# EAGLE board Arduino-I2C-Shield-Panel-0.51mm (EAGLE 7.7.0), part 1 of 2
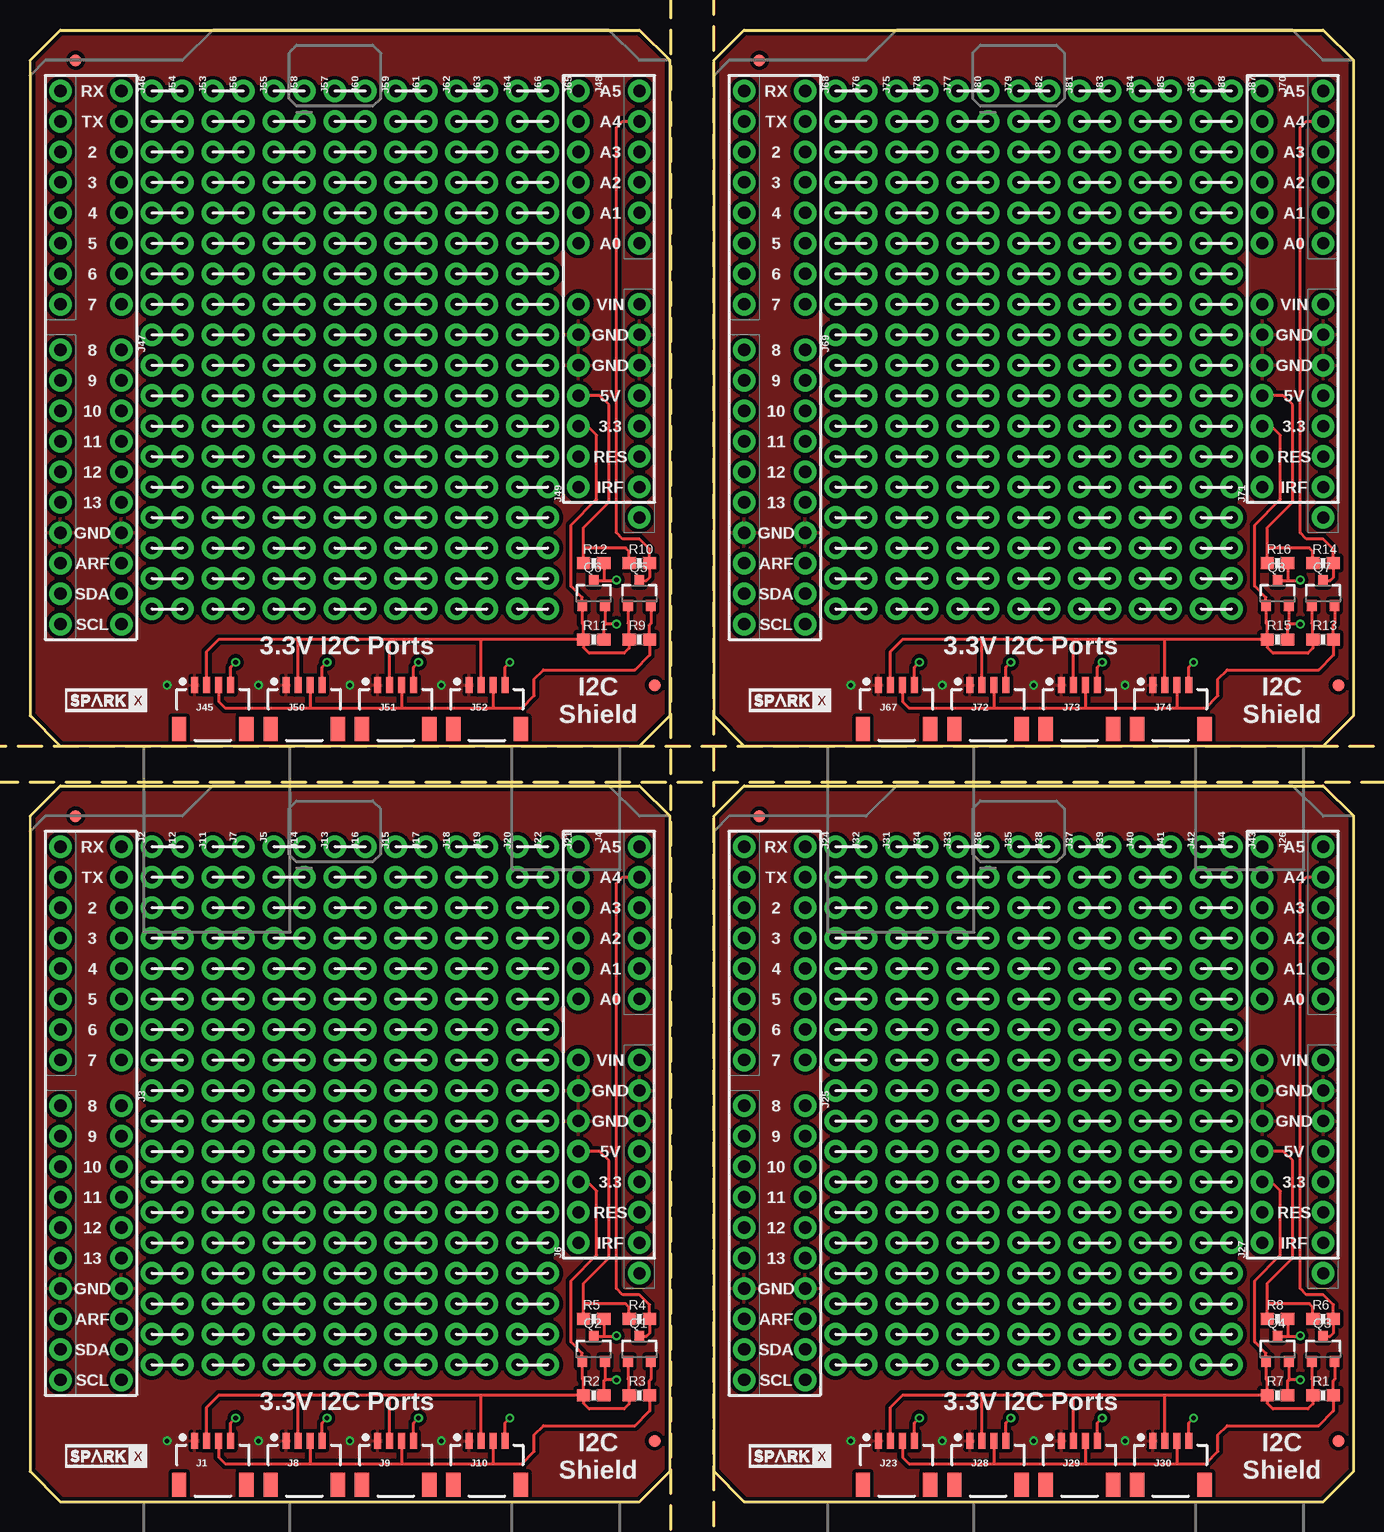
[diagram p0: board, top side]
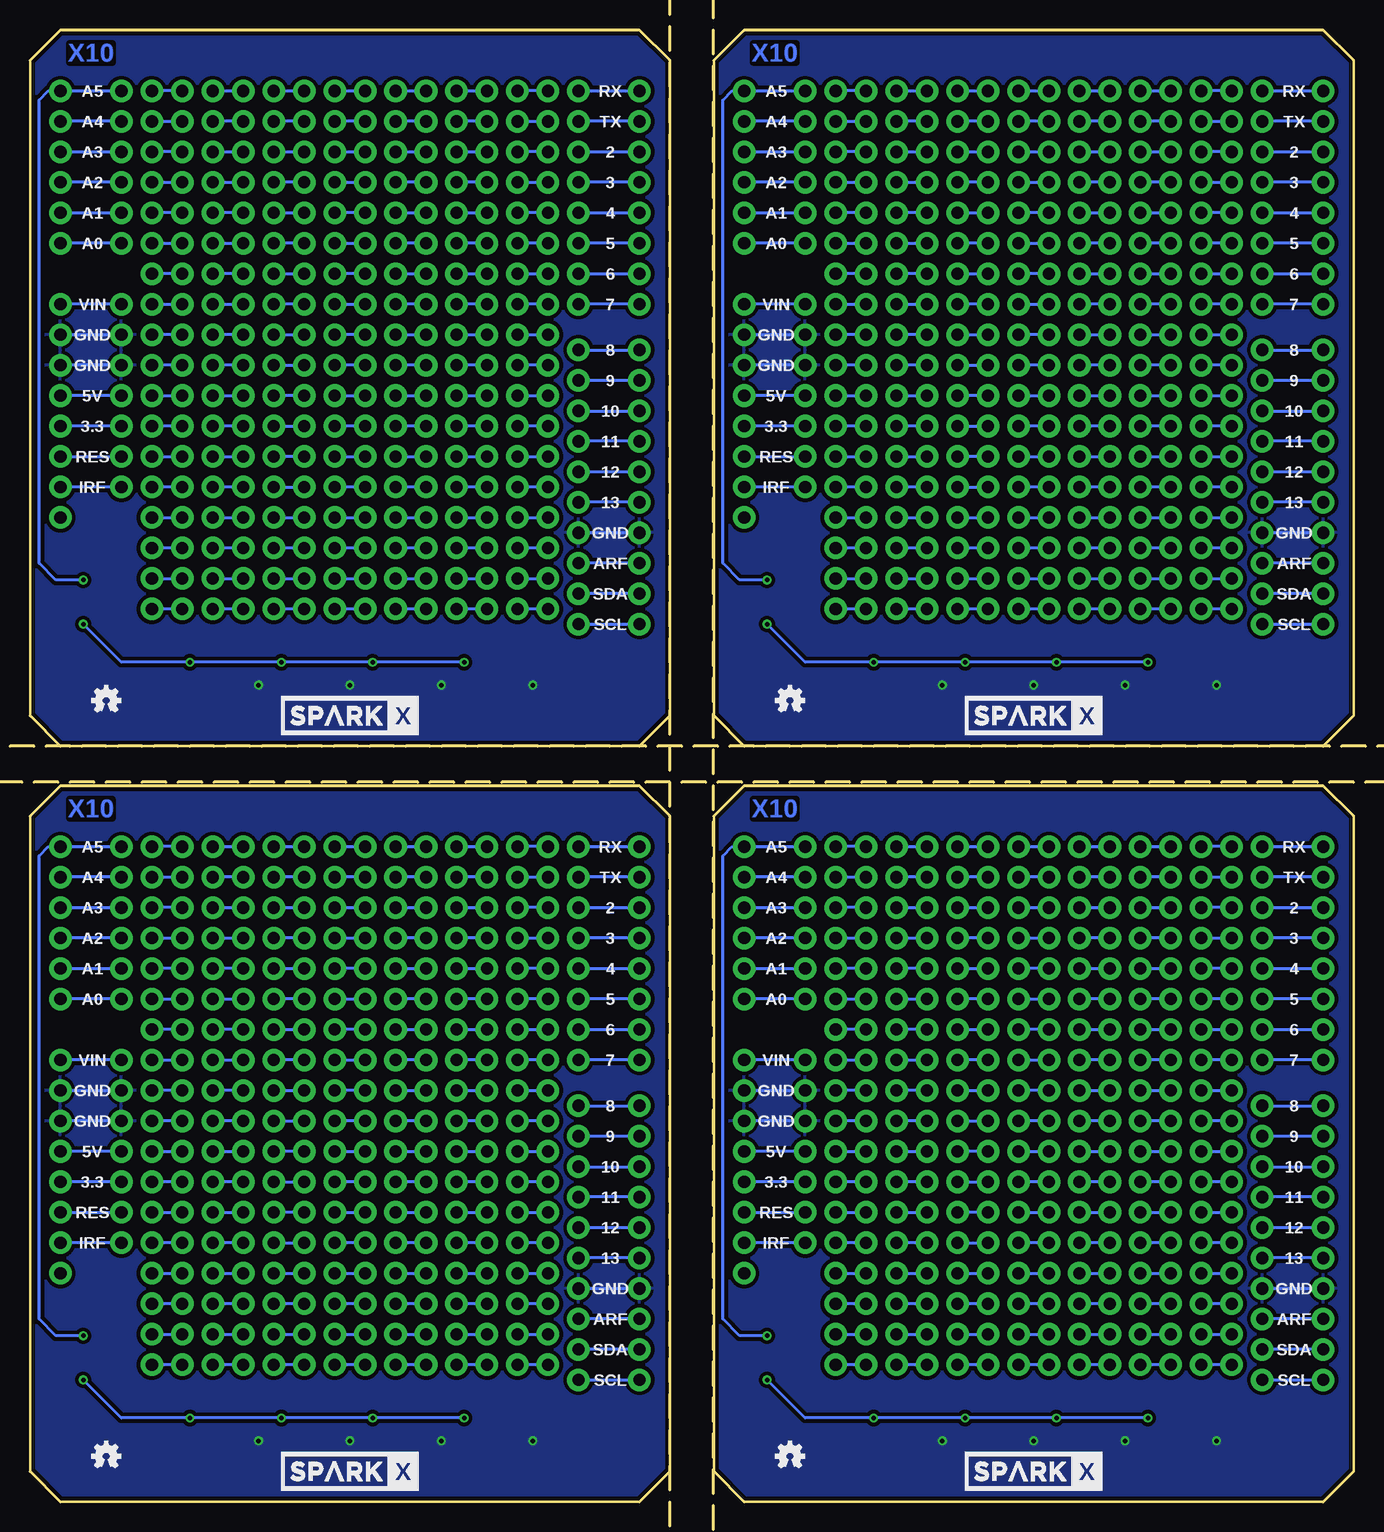
[diagram p1: board, bottom side, seen from below]

Size 110.34 x 122.69 mm. Coordinates in mm from the lower left corner, seen from the top.
Outline: 53.34,2.54 53.34,57.15 50.8,59.69 2.54,59.69 0,57.15 0,2.54 2.54,0 50.8,0 53.34,2.54
Outline: 110.34,2.54 110.34,57.15 107.8,59.69 59.54,59.69 57,57.15 57,2.54 59.54,0 107.8,0 110.34,2.54
Outline: 53.34,65.54 53.34,120.15 50.8,122.69 2.54,122.69 0,120.15 0,65.54 2.54,63 50.8,63 53.34,65.54
Outline: 110.34,65.54 110.34,120.15 107.8,122.69 59.54,122.69 57,120.15 57,65.54 59.54,63 107.8,63 110.34,65.54
Copper layers (1*16): Top 0.035mm / dielectric 1.5mm / Bottom 0.035mm
Design rules "SparkFun-2-layer-TIGHT": minimum track width 7mil, minimum drill 15mil, track to track 7mil, track to pad 7mil, pad to pad 7mil, via to via 7mil, smd to smd 7mil, copper to edge 7mil, drill to drill 7mil, minimum pad ring 7mil, minimum via ring 7mil, stop-mask expansion 4mil, vias tented up to drill 25mil, thermal gap 10mil
Net classes: 0 Default: width 0.203 mm; 1 vcc: width 0.203 mm
Milling: 189 lines

## Footprints (pad centres in the part's own frame; a part is rotated, then mirrored left to right if it is on the bottom)
FIDUCIAL-1X2 = smd 1 x 1: 1 0,0
1X04_1MM_RA = smd 0.6 x 1.35: 1 -1.5,0; 2 -0.5,0; 3 0.5,0; 4 1.5,0 | smd 1.2 x 2: NC1 2.8,-3.675; NC2 -2.8,-3.675
1X08_NO_SILK = drill 1.016 pad 1.88: 1 0,0; 2 2.54,0; 3 5.08,0; 4 7.62,0; 5 10.16,0; 6 12.7,0; 7 15.24,0; 8 17.78,0
1X10_NO_SILK = drill 1.016 pad 1.88: 1 0,0; 2 2.54,0; 3 5.08,0; 4 7.62,0; 5 10.16,0; 6 12.7,0; 7 15.24,0; 8 17.78,0; 9 20.32,0; 10 22.86,0
1X06_NO_SILK = drill 1.016 pad 1.88: 1 0,0; 2 2.54,0; 3 5.08,0; 4 7.62,0; 5 10.16,0; 6 12.7,0
1X18_NO_SILK = drill 1.016 pad 1.88: 1 0,0; 2 2.54,0; 3 5.08,0; 4 7.62,0; 5 10.16,0; 6 12.7,0; 7 15.24,0; 8 17.78,0; 9 20.32,0; 10 22.86,0; 11 25.4,0; 12 27.94,0; 13 30.48,0; 14 33.02,0; 15 35.56,0; 16 38.1,0; 17 40.64,0; 18 43.18,0
1X07_NO_SILK = drill 1.016 pad 1.88: 1 0,0; 2 2.54,0; 3 5.08,0; 4 7.62,0; 5 10.16,0; 6 12.7,0; 7 15.24,0
SOT23-3 = smd 0.8 x 0.9: 1 -0.95,-1; 2 0.95,-1; 3 0,1.1
0603-RES = smd 1.1 x 1: 1 -0.85,0; 2 0.85,0
UNO_R3_SHIELD_NOLABELS = drill 1.016 pad 1.88: 3.3V 50.8,26.67; 5V 50.8,29.21; A0 50.8,41.91; A1 50.8,44.45; A2 50.8,46.99; A3 50.8,49.53; A4 50.8,52.07; A5 50.8,54.61; AREF 2.54,15.24; D2 2.54,49.53; D3 2.54,46.99; D4 2.54,44.45; D5 2.54,41.91; D6 2.54,39.37; D7 2.54,36.83; D8 2.54,33.02; D9 2.54,30.48; D10 2.54,27.94; D11 2.54,25.4; D12 2.54,22.86; D13 2.54,20.32; GND@0 50.8,31.75; GND@1 50.8,34.29; GND@2 2.54,17.78; IOREF 50.8,21.59; NC 50.8,19.05; RES 50.8,24.13; RX 2.54,54.61; SCL 2.54,10.16; SDA 2.54,12.7; TX 2.54,52.07; VIN 50.8,36.83

## Placement (x,y rotation side)
FD1  FIDUCIAL1X2  [FIDUCIAL-1X2]  52.07,5.08 0 top
FD2  FIDUCIAL1X2  [FIDUCIAL-1X2]  3.81,57.15 0 top
FD3  FIDUCIAL1X2  [FIDUCIAL-1X2]  109.07,5.08 0 top
FD4  FIDUCIAL1X2  [FIDUCIAL-1X2]  60.81,57.15 0 top
FD5  FIDUCIAL1X2  [FIDUCIAL-1X2]  52.07,68.08 0 top
FD6  FIDUCIAL1X2  [FIDUCIAL-1X2]  3.81,120.15 0 top
FD7  FIDUCIAL1X2  [FIDUCIAL-1X2]  109.07,68.08 0 top
FD8  FIDUCIAL1X2  [FIDUCIAL-1X2]  60.81,120.15 0 top
J1  [1X04_1MM_RA]  15.24,5.08 0 top
J2  [1X08_NO_SILK]  7.62,54.61 270 top
J3  [1X10_NO_SILK]  7.62,33.02 270 top
J4  [1X06_NO_SILK]  45.72,54.61 270 top
J5  [1X18_NO_SILK]  17.78,54.61 270 top
J6  [1X07_NO_SILK]  45.72,21.59 90 top
J7  [1X18_NO_SILK]  15.24,54.61 270 top
J8  [1X04_1MM_RA]  22.86,5.08 0 top
J9  [1X04_1MM_RA]  30.48,5.08 0 top
J10  [1X04_1MM_RA]  38.1,5.08 0 top
J11  [1X18_NO_SILK]  12.7,54.61 270 top
J12  [1X18_NO_SILK]  10.16,54.61 270 top
J13  [1X18_NO_SILK]  22.86,54.61 270 top
J14  [1X18_NO_SILK]  20.32,54.61 270 top
J15  [1X18_NO_SILK]  27.94,54.61 270 top
J16  [1X18_NO_SILK]  25.4,54.61 270 top
J17  [1X18_NO_SILK]  30.48,54.61 270 top
J18  [1X18_NO_SILK]  33.02,54.61 270 top
J19  [1X18_NO_SILK]  35.56,54.61 270 top
J20  [1X18_NO_SILK]  38.1,54.61 270 top
J21  [1X18_NO_SILK]  43.18,54.61 270 top
J22  [1X18_NO_SILK]  40.64,54.61 270 top
J23  [1X04_1MM_RA]  72.24,5.08 0 top
J24  [1X08_NO_SILK]  64.62,54.61 270 top
J25  [1X10_NO_SILK]  64.62,33.02 270 top
J26  [1X06_NO_SILK]  102.72,54.61 270 top
J27  [1X07_NO_SILK]  102.72,21.59 90 top
J28  [1X04_1MM_RA]  79.86,5.08 0 top
J29  [1X04_1MM_RA]  87.48,5.08 0 top
J30  [1X04_1MM_RA]  95.1,5.08 0 top
J31  [1X18_NO_SILK]  69.7,54.61 270 top
J32  [1X18_NO_SILK]  67.16,54.61 270 top
J33  [1X18_NO_SILK]  74.78,54.61 270 top
J34  [1X18_NO_SILK]  72.24,54.61 270 top
J35  [1X18_NO_SILK]  79.86,54.61 270 top
J36  [1X18_NO_SILK]  77.32,54.61 270 top
J37  [1X18_NO_SILK]  84.94,54.61 270 top
J38  [1X18_NO_SILK]  82.4,54.61 270 top
J39  [1X18_NO_SILK]  87.48,54.61 270 top
J40  [1X18_NO_SILK]  90.02,54.61 270 top
J41  [1X18_NO_SILK]  92.56,54.61 270 top
J42  [1X18_NO_SILK]  95.1,54.61 270 top
J43  [1X18_NO_SILK]  100.18,54.61 270 top
J44  [1X18_NO_SILK]  97.64,54.61 270 top
J45  [1X04_1MM_RA]  15.24,68.08 0 top
J46  [1X08_NO_SILK]  7.62,117.61 270 top
J47  [1X10_NO_SILK]  7.62,96.02 270 top
J48  [1X06_NO_SILK]  45.72,117.61 270 top
J49  [1X07_NO_SILK]  45.72,84.59 90 top
J50  [1X04_1MM_RA]  22.86,68.08 0 top
J51  [1X04_1MM_RA]  30.48,68.08 0 top
J52  [1X04_1MM_RA]  38.1,68.08 0 top
J53  [1X18_NO_SILK]  12.7,117.61 270 top
J54  [1X18_NO_SILK]  10.16,117.61 270 top
J55  [1X18_NO_SILK]  17.78,117.61 270 top
J56  [1X18_NO_SILK]  15.24,117.61 270 top
J57  [1X18_NO_SILK]  22.86,117.61 270 top
J58  [1X18_NO_SILK]  20.32,117.61 270 top
J59  [1X18_NO_SILK]  27.94,117.61 270 top
J60  [1X18_NO_SILK]  25.4,117.61 270 top
J61  [1X18_NO_SILK]  30.48,117.61 270 top
J62  [1X18_NO_SILK]  33.02,117.61 270 top
J63  [1X18_NO_SILK]  35.56,117.61 270 top
J64  [1X18_NO_SILK]  38.1,117.61 270 top
J65  [1X18_NO_SILK]  43.18,117.61 270 top
J66  [1X18_NO_SILK]  40.64,117.61 270 top
J67  [1X04_1MM_RA]  72.24,68.08 0 top
J68  [1X08_NO_SILK]  64.62,117.61 270 top
J69  [1X10_NO_SILK]  64.62,96.02 270 top
J70  [1X06_NO_SILK]  102.72,117.61 270 top
J71  [1X07_NO_SILK]  102.72,84.59 90 top
J72  [1X04_1MM_RA]  79.86,68.08 0 top
J73  [1X04_1MM_RA]  87.48,68.08 0 top
J74  [1X04_1MM_RA]  95.1,68.08 0 top
J75  [1X18_NO_SILK]  69.7,117.61 270 top
J76  [1X18_NO_SILK]  67.16,117.61 270 top
J77  [1X18_NO_SILK]  74.78,117.61 270 top
J78  [1X18_NO_SILK]  72.24,117.61 270 top
J79  [1X18_NO_SILK]  79.86,117.61 270 top
J80  [1X18_NO_SILK]  77.32,117.61 270 top
J81  [1X18_NO_SILK]  84.94,117.61 270 top
J82  [1X18_NO_SILK]  82.4,117.61 270 top
J83  [1X18_NO_SILK]  87.48,117.61 270 top
J84  [1X18_NO_SILK]  90.02,117.61 270 top
J85  [1X18_NO_SILK]  92.56,117.61 270 top
J86  [1X18_NO_SILK]  95.1,117.61 270 top
J87  [1X18_NO_SILK]  100.18,117.61 270 top
J88  [1X18_NO_SILK]  97.64,117.61 270 top
LOGO1  OSHW-LOGOMINI  [OSHW-LOGO-MINI]  46.99,3.81 0 bottom
LOGO2  OSHW-LOGOMINI  [OSHW-LOGO-MINI]  103.99,3.81 0 bottom
LOGO3  OSHW-LOGOMINI  [OSHW-LOGO-MINI]  46.99,66.81 0 bottom
LOGO4  OSHW-LOGOMINI  [OSHW-LOGO-MINI]  103.99,66.81 0 bottom
Q1  200mA/50V  [SOT23-3]  50.8,12.7 0 top
Q2  200mA/50V  [SOT23-3]  46.99,12.7 0 top
Q3  200mA/50V  [SOT23-3]  107.8,12.7 0 top
Q4  200mA/50V  [SOT23-3]  103.99,12.7 0 top
Q5  200mA/50V  [SOT23-3]  50.8,75.7 0 top
Q6  200mA/50V  [SOT23-3]  46.99,75.7 0 top
Q7  200mA/50V  [SOT23-3]  107.8,75.7 0 top
Q8  200mA/50V  [SOT23-3]  103.99,75.7 0 top
R1  4.7K  [0603-RES]  107.8,8.89 0 top
R2  4.7K  [0603-RES]  46.99,8.89 0 top
R3  4.7K  [0603-RES]  50.8,8.89 0 top
R4  4.7K  [0603-RES]  50.8,15.24 0 top
R5  4.7K  [0603-RES]  46.99,15.24 0 top
R6  4.7K  [0603-RES]  107.8,15.24 0 top
R7  4.7K  [0603-RES]  103.99,8.89 0 top
R8  4.7K  [0603-RES]  103.99,15.24 0 top
R9  4.7K  [0603-RES]  50.8,71.89 0 top
R10  4.7K  [0603-RES]  50.8,78.24 0 top
R11  4.7K  [0603-RES]  46.99,71.89 0 top
R12  4.7K  [0603-RES]  46.99,78.24 0 top
R13  4.7K  [0603-RES]  107.8,71.89 0 top
R14  4.7K  [0603-RES]  107.8,78.24 0 top
R15  4.7K  [0603-RES]  103.99,71.89 0 top
R16  4.7K  [0603-RES]  103.99,78.24 0 top
U1  ARDUINO UNO  [UNO_R3_SHIELD_NOLABELS]  0,0 0 top
U2  ARDUINO UNO  [UNO_R3_SHIELD_NOLABELS]  57,0 0 top
U3  ARDUINO UNO  [UNO_R3_SHIELD_NOLABELS]  0,63 0 top
U4  ARDUINO UNO  [UNO_R3_SHIELD_NOLABELS]  57,63 0 top
U$1  SPARKX-LOGO3  [SPARKX-SMALL]  6.35,3.81 0 top
U$2  SPARKX-LOGO5  [SPARKX-LARGE]  26.67,2.54 0 bottom
U$3  SPARKX-LOGO3  [SPARKX-SMALL]  63.35,3.81 0 top
U$4  SPARKX-LOGO5  [SPARKX-LARGE]  83.67,2.54 0 bottom
U$5  SPARKX-LOGO3  [SPARKX-SMALL]  6.35,66.81 0 top
U$6  SPARKX-LOGO5  [SPARKX-LARGE]  26.67,65.54 0 bottom
U$7  SPARKX-LOGO3  [SPARKX-SMALL]  63.35,66.81 0 top
U$8  SPARKX-LOGO5  [SPARKX-LARGE]  83.67,65.54 0 bottom

## Library data of the parts
FD1-FD8 LOGO1-LOGO4 = SparkFun-Aesthetics
J1 J5 J7-J23 J28-J45 J50-J67 J72-J88 U$1-U$8 = SparkX
J2 J24 J46 J68 = SparkFun-Connectors; PROD_ID: CONN-08438
J3 J25 J47 J69 = SparkFun-Connectors; PROD_ID: CONN-11563
J4 J26 J48 J70 = SparkFun-Connectors; PROD_ID: CONN-08437
J6 J27 J49 J71 = SparkFun-Connectors
Q1-Q8 = SparkFun-DiscreteSemi; PROD_ID: TRANS-00830
R1-R16 = SparkFun-Resistors; PROD_ID: RES-07857
U1-U4 = SparkFun-Boards

## Nets
3.3V: J1.2 J6.3 J8.2 J9.2 J10.2 Q1.1 Q2.1 R2.1 R3.1 U1.3.3V
3.3V1: J23.2 J27.3 J28.2 J29.2 J30.2 Q3.1 Q4.1 R1.1 R7.1 U2.3.3V
3.3V2: J45.2 J49.3 J50.2 J51.2 J52.2 Q5.1 Q6.1 R9.1 R11.1 U3.3.3V
3.3V3: J67.2 J71.3 J72.2 J73.2 J74.2 Q7.1 Q8.1 R13.1 R15.1 U4.3.3V
5V: J6.4 R4.1 R5.1 U1.5V
5V1: J27.4 R6.1 R8.1 U2.5V
5V2: J49.4 R10.1 R12.1 U3.5V
5V3: J71.4 R14.1 R16.1 U4.5V
A0: J4.6 U1.A0
A1: J4.5 U1.A1
A2: J4.4 U1.A2
A3: J4.3 U1.A3
A4: J26.3 U2.A3
A5: J26.4 U2.A2
A6: J26.5 U2.A1
A7: J26.6 U2.A0
A8: J48.3 U3.A3
A9: J48.4 U3.A2
A10: J48.5 U3.A1
A11: J48.6 U3.A0
A12: J70.3 U4.A3
A13: J70.4 U4.A2
A14: J70.5 U4.A1
A15: J70.6 U4.A0
AREF: J3.8 U1.AREF
AREF1: J25.8 U2.AREF
AREF2: J47.8 U3.AREF
AREF3: J69.8 U4.AREF
D1: J24.3 U2.D2
D2: J2.3 U1.D2
D3: J2.4 U1.D3
D4: J2.5 U1.D4
D5: J2.6 U1.D5
D6: J2.7 U1.D6
D7: J2.8 U1.D7
D8: J3.1 U1.D8
D9: J3.2 U1.D9
D10: J3.3 U1.D10
D11: J3.4 U1.D11
D12: J3.5 U1.D12
D13: J3.6 U1.D13
D14: J24.4 U2.D3
D15: J24.5 U2.D4
D16: J24.6 U2.D5
D17: J24.7 U2.D6
D18: J24.8 U2.D7
D19: J25.1 U2.D8
D20: J25.2 U2.D9
D21: J25.3 U2.D10
D22: J25.4 U2.D11
D23: J25.5 U2.D12
D24: J25.6 U2.D13
D25: J46.3 U3.D2
D26: J46.4 U3.D3
D27: J46.5 U3.D4
D28: J46.6 U3.D5
D29: J46.7 U3.D6
D30: J46.8 U3.D7
D31: J47.1 U3.D8
D32: J47.2 U3.D9
D33: J47.3 U3.D10
D34: J47.4 U3.D11
D35: J47.5 U3.D12
D36: J47.6 U3.D13
D37: J68.3 U4.D2
D38: J68.4 U4.D3
D39: J68.5 U4.D4
D40: J68.6 U4.D5
D41: J68.7 U4.D6
D42: J68.8 U4.D7
D43: J69.1 U4.D8
D44: J69.2 U4.D9
D45: J69.3 U4.D10
D46: J69.4 U4.D11
D47: J69.5 U4.D12
D48: J69.6 U4.D13
GND [vcc]: J1.1 J3.7 J6.5 J6.6 J8.1 J9.1 J10.1 U1.GND@0 U1.GND@1 U1.GND@2
GND1 [vcc]: J23.1 J25.7 J27.5 J27.6 J28.1 J29.1 J30.1 U2.GND@0 U2.GND@1 U2.GND@2
GND2 [vcc]: J45.1 J47.7 J49.5 J49.6 J50.1 J51.1 J52.1 U3.GND@0 U3.GND@1 U3.GND@2
GND3 [vcc]: J67.1 J69.7 J71.5 J71.6 J72.1 J73.1 J74.1 U4.GND@0 U4.GND@1 U4.GND@2
HV_SCL: J4.1 Q2.3 R5.2 U1.A5
HV_SCL1: J26.1 Q4.3 R8.2 U2.A5
HV_SCL2: J48.1 Q6.3 R12.2 U3.A5
HV_SCL3: J70.1 Q8.3 R16.2 U4.A5
HV_SDA: J4.2 Q1.3 R4.2 U1.A4
HV_SDA1: J26.2 Q3.3 R6.2 U2.A4
HV_SDA2: J48.2 Q5.3 R10.2 U3.A4
HV_SDA3: J70.2 Q7.3 R14.2 U4.A4
IOREF: J6.1 U1.IOREF
IOREF1: J27.1 U2.IOREF
IOREF2: J49.1 U3.IOREF
IOREF3: J71.1 U4.IOREF
N$1: J5.2 J7.2
N$2: J5.3 J7.3
N$3: J5.4 J7.4
N$4: J5.5 J7.5
N$5: J5.6 J7.6
N$6: J5.7 J7.7
N$7: J5.8 J7.8
N$8: J5.9 J7.9
N$9: J5.10 J7.10
N$10: J5.11 J7.11
N$11: J5.12 J7.12
N$12: J5.13 J7.13
N$13: J5.14 J7.14
N$14: J5.15 J7.15
N$15: J5.16 J7.16
N$16: J5.17 J7.17
N$17: J5.18 J7.18
N$18: J5.1 J7.1
N$19: J13.2 J14.2
N$20: J13.3 J14.3
N$21: J11.2 J12.2
N$22: J11.3 J12.3
N$23: J11.4 J12.4
N$24: J11.5 J12.5
N$25: J11.6 J12.6
N$26: J11.7 J12.7
N$27: J11.8 J12.8
N$28: J11.9 J12.9
N$29: J11.10 J12.10
N$30: J11.11 J12.11
N$31: J11.12 J12.12
N$32: J11.13 J12.13
N$33: J11.14 J12.14
N$34: J11.15 J12.15
N$35: J11.16 J12.16
N$36: J11.17 J12.17
N$37: J11.18 J12.18
N$38: J11.1 J12.1
N$39: J13.4 J14.4
N$40: J13.5 J14.5
N$41: J13.6 J14.6
N$42: J13.7 J14.7
N$43: J13.8 J14.8
N$44: J13.9 J14.9
N$45: J13.10 J14.10
N$46: J13.11 J14.11
N$47: J13.12 J14.12
N$48: J13.13 J14.13
N$49: J13.14 J14.14
N$50: J13.15 J14.15
N$51: J13.16 J14.16
N$52: J13.17 J14.17
N$53: J13.18 J14.18
N$54: J13.1 J14.1
N$55: J15.2 J16.2
N$56: J15.3 J16.3
N$57: J15.4 J16.4
N$58: J15.5 J16.5
N$59: J15.6 J16.6
N$60: J15.7 J16.7
N$61: J15.8 J16.8
N$62: J15.9 J16.9
N$63: J15.10 J16.10
N$64: J15.11 J16.11
N$65: J15.12 J16.12
N$66: J15.13 J16.13
N$67: J15.14 J16.14
N$68: J15.15 J16.15
N$69: J15.16 J16.16
N$70: J15.17 J16.17
N$71: J15.18 J16.18
N$72: J15.1 J16.1
N$73: J17.2 J18.2
N$74: J17.3 J18.3
N$75: J17.4 J18.4
N$76: J17.5 J18.5
N$77: J17.6 J18.6
N$78: J17.7 J18.7
N$79: J17.8 J18.8
N$80: J17.9 J18.9
N$81: J17.10 J18.10
N$82: J17.11 J18.11
N$83: J17.12 J18.12
N$84: J17.13 J18.13
N$85: J17.14 J18.14
N$86: J17.15 J18.15
N$87: J17.16 J18.16
N$88: J17.17 J18.17
N$89: J17.18 J18.18
N$90: J17.1 J18.1
N$91: J19.2 J20.2
N$92: J19.3 J20.3
N$93: J19.4 J20.4
N$94: J19.5 J20.5
N$95: J19.6 J20.6
N$96: J19.7 J20.7
N$97: J19.8 J20.8
N$98: J19.9 J20.9
N$99: J19.10 J20.10
N$100: J19.11 J20.11
N$101: J19.12 J20.12
N$102: J19.13 J20.13
N$103: J19.14 J20.14
N$104: J19.15 J20.15
N$105: J19.16 J20.16
N$106: J19.17 J20.17
N$107: J19.18 J20.18
N$108: J19.1 J20.1
N$109: J21.2 J22.2
N$110: J21.3 J22.3
N$111: J21.4 J22.4
N$112: J21.5 J22.5
N$113: J21.6 J22.6
N$114: J21.7 J22.7
N$115: J21.8 J22.8
N$116: J21.9 J22.9
N$117: J21.10 J22.10
N$118: J21.11 J22.11
N$119: J21.12 J22.12
N$120: J21.13 J22.13
N$121: J21.14 J22.14
N$122: J21.15 J22.15
N$123: J21.16 J22.16
N$124: J21.17 J22.17
N$125: J21.18 J22.18
N$126: J21.1 J22.1
N$127: J31.2 J32.2
N$128: J31.3 J32.3
N$129: J31.4 J32.4
N$130: J31.5 J32.5
N$131: J31.6 J32.6
N$132: J31.7 J32.7
N$133: J31.8 J32.8
N$134: J31.9 J32.9
N$135: J31.10 J32.10
N$136: J31.11 J32.11
N$137: J31.12 J32.12
N$138: J31.13 J32.13
N$139: J31.14 J32.14
N$140: J31.15 J32.15
N$141: J31.16 J32.16
N$142: J31.17 J32.17
N$143: J31.18 J32.18
N$144: J31.1 J32.1
N$145: J33.2 J34.2
N$146: J33.3 J34.3
N$147: J33.4 J34.4
N$148: J33.5 J34.5
N$149: J33.6 J34.6
N$150: J33.7 J34.7
N$151: J33.8 J34.8
N$152: J33.9 J34.9
N$153: J33.10 J34.10
N$154: J33.11 J34.11
N$155: J33.12 J34.12
N$156: J33.13 J34.13
N$157: J33.14 J34.14
N$158: J33.15 J34.15
N$159: J33.16 J34.16
N$160: J33.17 J34.17
N$161: J33.18 J34.18
N$162: J33.1 J34.1
N$163: J35.2 J36.2
N$164: J35.3 J36.3
N$165: J35.4 J36.4
N$166: J35.5 J36.5
N$167: J35.6 J36.6
N$168: J35.7 J36.7
N$169: J35.8 J36.8
N$170: J35.9 J36.9
N$171: J35.10 J36.10
N$172: J35.11 J36.11
N$173: J35.12 J36.12
N$174: J35.13 J36.13
N$175: J35.14 J36.14
N$176: J35.15 J36.15
N$177: J35.16 J36.16
N$178: J35.17 J36.17
N$179: J35.18 J36.18
N$180: J35.1 J36.1
N$181: J37.2 J38.2
N$182: J37.3 J38.3
N$183: J37.4 J38.4
N$184: J37.5 J38.5
N$185: J37.6 J38.6
N$186: J37.7 J38.7
N$187: J37.8 J38.8
N$188: J37.9 J38.9
N$189: J37.10 J38.10
N$190: J37.11 J38.11
N$191: J37.12 J38.12
N$192: J37.13 J38.13
N$193: J37.14 J38.14
N$194: J37.15 J38.15
N$195: J37.16 J38.16
N$196: J37.17 J38.17
N$197: J37.18 J38.18
N$198: J37.1 J38.1
N$199: J39.2 J40.2
N$200: J39.3 J40.3
N$201: J39.4 J40.4
N$202: J39.5 J40.5
N$203: J39.6 J40.6
N$204: J39.7 J40.7
N$205: J39.8 J40.8
N$206: J39.9 J40.9
N$207: J39.10 J40.10
N$208: J39.11 J40.11
N$209: J39.12 J40.12
N$210: J39.13 J40.13
N$211: J39.14 J40.14
N$212: J39.15 J40.15
N$213: J39.16 J40.16
N$214: J39.17 J40.17
N$215: J39.18 J40.18
N$216: J39.1 J40.1
N$217: J41.2 J42.2
N$218: J41.3 J42.3
N$219: J41.4 J42.4
N$220: J41.5 J42.5
N$221: J41.6 J42.6
N$222: J41.7 J42.7
N$223: J41.8 J42.8
N$224: J41.9 J42.9
N$225: J41.10 J42.10
N$226: J41.11 J42.11
N$227: J41.12 J42.12
N$228: J41.13 J42.13
N$229: J41.14 J42.14
N$230: J41.15 J42.15
N$231: J41.16 J42.16
N$232: J41.17 J42.17
N$233: J41.18 J42.18
N$234: J41.1 J42.1
N$235: J43.2 J44.2
N$236: J43.3 J44.3
N$237: J43.4 J44.4
N$238: J43.5 J44.5
N$239: J43.6 J44.6
N$240: J43.7 J44.7
N$241: J43.8 J44.8
N$242: J43.9 J44.9
N$243: J43.10 J44.10
N$244: J43.11 J44.11
N$245: J43.12 J44.12
N$246: J43.13 J44.13
N$247: J43.14 J44.14
N$248: J43.15 J44.15
N$249: J43.16 J44.16
N$250: J43.17 J44.17
N$251: J43.18 J44.18
N$252: J43.1 J44.1
N$253: J53.2 J54.2
N$254: J53.3 J54.3
N$255: J53.4 J54.4
N$256: J53.5 J54.5
N$257: J53.6 J54.6
N$258: J53.7 J54.7
N$259: J53.8 J54.8
N$260: J53.9 J54.9
N$261: J53.10 J54.10
N$262: J53.11 J54.11
N$263: J53.12 J54.12
N$264: J53.13 J54.13
N$265: J53.14 J54.14
N$266: J53.15 J54.15
N$267: J53.16 J54.16
N$268: J53.17 J54.17
N$269: J53.18 J54.18
N$270: J53.1 J54.1
N$271: J55.2 J56.2
N$272: J55.3 J56.3
N$273: J55.4 J56.4
N$274: J55.5 J56.5
N$275: J55.6 J56.6
N$276: J55.7 J56.7
N$277: J55.8 J56.8
N$278: J55.9 J56.9
N$279: J55.10 J56.10
N$280: J55.11 J56.11
N$281: J55.12 J56.12
N$282: J55.13 J56.13
N$283: J55.14 J56.14
N$284: J55.15 J56.15
N$285: J55.16 J56.16
N$286: J55.17 J56.17
N$287: J55.18 J56.18
N$288: J55.1 J56.1
N$289: J57.2 J58.2
N$290: J57.3 J58.3
N$291: J57.4 J58.4
N$292: J57.5 J58.5
N$293: J57.6 J58.6
N$294: J57.7 J58.7
N$295: J57.8 J58.8
N$296: J57.9 J58.9
N$297: J57.10 J58.10
N$298: J57.11 J58.11
N$299: J57.12 J58.12
N$300: J57.13 J58.13
N$301: J57.14 J58.14
N$302: J57.15 J58.15
N$303: J57.16 J58.16
N$304: J57.17 J58.17
N$305: J57.18 J58.18
N$306: J57.1 J58.1
N$307: J59.2 J60.2
N$308: J59.3 J60.3
N$309: J59.4 J60.4
N$310: J59.5 J60.5
N$311: J59.6 J60.6
N$312: J59.7 J60.7
N$313: J59.8 J60.8
N$314: J59.9 J60.9
N$315: J59.10 J60.10
N$316: J59.11 J60.11
N$317: J59.12 J60.12
N$318: J59.13 J60.13
N$319: J59.14 J60.14
N$320: J59.15 J60.15
N$321: J59.16 J60.16
N$322: J59.17 J60.17
N$323: J59.18 J60.18
N$324: J59.1 J60.1
N$325: J61.2 J62.2
N$326: J61.3 J62.3
N$327: J61.4 J62.4
N$328: J61.5 J62.5
N$329: J61.6 J62.6
N$330: J61.7 J62.7
N$331: J61.8 J62.8
N$332: J61.9 J62.9
N$333: J61.10 J62.10
N$334: J61.11 J62.11
N$335: J61.12 J62.12
N$336: J61.13 J62.13
N$337: J61.14 J62.14
N$338: J61.15 J62.15
N$339: J61.16 J62.16
N$340: J61.17 J62.17
N$341: J61.18 J62.18
N$342: J61.1 J62.1
N$343: J63.2 J64.2
N$344: J63.3 J64.3
N$345: J63.4 J64.4
N$346: J63.5 J64.5
N$347: J63.6 J64.6
N$348: J63.7 J64.7
N$349: J63.8 J64.8
N$350: J63.9 J64.9
N$351: J63.10 J64.10
N$352: J63.11 J64.11
N$353: J63.12 J64.12
N$354: J63.13 J64.13
N$355: J63.14 J64.14
N$356: J63.15 J64.15
N$357: J63.16 J64.16
N$358: J63.17 J64.17
N$359: J63.18 J64.18
N$360: J63.1 J64.1
N$361: J65.2 J66.2
N$362: J65.3 J66.3
N$363: J65.4 J66.4
N$364: J65.5 J66.5
N$365: J65.6 J66.6
N$366: J65.7 J66.7
N$367: J65.8 J66.8
N$368: J65.9 J66.9
N$369: J65.10 J66.10
N$370: J65.11 J66.11
N$371: J65.12 J66.12
N$372: J65.13 J66.13
N$373: J65.14 J66.14
N$374: J65.15 J66.15
N$375: J65.16 J66.16
N$376: J65.17 J66.17
N$377: J65.18 J66.18
N$378: J65.1 J66.1
N$379: J75.2 J76.2
N$380: J75.3 J76.3
N$381: J75.4 J76.4
N$382: J75.5 J76.5
N$383: J75.6 J76.6
N$384: J75.7 J76.7
N$385: J75.8 J76.8
N$386: J75.9 J76.9
N$387: J75.10 J76.10
N$388: J75.11 J76.11
N$389: J75.12 J76.12
N$390: J75.13 J76.13
N$391: J75.14 J76.14
N$392: J75.15 J76.15
N$393: J75.16 J76.16
N$394: J75.17 J76.17
N$395: J75.18 J76.18
N$396: J75.1 J76.1
N$397: J77.2 J78.2
N$398: J77.3 J78.3
N$399: J77.4 J78.4
N$400: J77.5 J78.5
N$401: J77.6 J78.6
N$402: J77.7 J78.7
N$403: J77.8 J78.8
N$404: J77.9 J78.9
N$405: J77.10 J78.10
N$406: J77.11 J78.11
N$407: J77.12 J78.12
N$408: J77.13 J78.13
N$409: J77.14 J78.14
N$410: J77.15 J78.15
N$411: J77.16 J78.16
N$412: J77.17 J78.17
N$413: J77.18 J78.18
N$414: J77.1 J78.1
N$415: J79.2 J80.2
N$416: J79.3 J80.3
N$417: J79.4 J80.4
N$418: J79.5 J80.5
N$419: J79.6 J80.6
N$420: J79.7 J80.7
N$421: J79.8 J80.8
N$422: J79.9 J80.9
N$423: J79.10 J80.10
N$424: J79.11 J80.11
N$425: J79.12 J80.12
N$426: J79.13 J80.13
N$427: J79.14 J80.14
N$428: J79.15 J80.15
N$429: J79.16 J80.16
N$430: J79.17 J80.17
N$431: J79.18 J80.18
N$432: J79.1 J80.1
N$433: J81.2 J82.2
N$434: J81.3 J82.3
N$435: J81.4 J82.4
N$436: J81.5 J82.5
N$437: J81.6 J82.6
N$438: J81.7 J82.7
N$439: J81.8 J82.8
N$440: J81.9 J82.9
N$441: J81.10 J82.10
N$442: J81.11 J82.11
N$443: J81.12 J82.12
N$444: J81.13 J82.13
N$445: J81.14 J82.14
N$446: J81.15 J82.15
N$447: J81.16 J82.16
N$448: J81.17 J82.17
N$449: J81.18 J82.18
N$450: J81.1 J82.1
N$451: J83.2 J84.2
N$452: J83.3 J84.3
N$453: J83.4 J84.4
N$454: J83.5 J84.5
N$455: J83.6 J84.6
N$456: J83.7 J84.7
N$457: J83.8 J84.8
N$458: J83.9 J84.9
N$459: J83.10 J84.10
N$460: J83.11 J84.11
N$461: J83.12 J84.12
N$462: J83.13 J84.13
N$463: J83.14 J84.14
N$464: J83.15 J84.15
N$465: J83.16 J84.16
N$466: J83.17 J84.17
N$467: J83.18 J84.18
N$468: J83.1 J84.1
N$469: J85.2 J86.2
N$470: J85.3 J86.3
N$471: J85.4 J86.4
N$472: J85.5 J86.5
N$473: J85.6 J86.6
N$474: J85.7 J86.7
N$475: J85.8 J86.8
N$476: J85.9 J86.9
N$477: J85.10 J86.10
N$478: J85.11 J86.11
N$479: J85.12 J86.12
N$480: J85.13 J86.13
N$481: J85.14 J86.14
N$482: J85.15 J86.15
N$483: J85.16 J86.16
N$484: J85.17 J86.17
N$485: J85.18 J86.18
N$486: J85.1 J86.1
N$487: J87.2 J88.2
N$488: J87.3 J88.3
N$489: J87.4 J88.4
N$490: J87.5 J88.5
N$491: J87.6 J88.6
N$492: J87.7 J88.7
N$493: J87.8 J88.8
N$494: J87.9 J88.9
N$495: J87.10 J88.10
N$496: J87.11 J88.11
N$497: J87.12 J88.12
N$498: J87.13 J88.13
N$499: J87.14 J88.14
N$500: J87.15 J88.15
N$501: J87.16 J88.16
N$502: J87.17 J88.17
N$503: J87.18 J88.18
N$504: J87.1 J88.1
RES: J6.2 U1.RES
RES1: J27.2 U2.RES
RES2: J49.2 U3.RES
RES3: J71.2 U4.RES
RX: J2.1 U1.RX
RX1: J24.1 U2.RX
RX2: J46.1 U3.RX
RX3: J68.1 U4.RX
SCL: J1.4 J8.4 J9.4 J10.4 Q2.2 R2.2
SCL1: J3.10 U1.SCL
SCL2: J23.4 J28.4 J29.4 J30.4 Q4.2 R7.2
SCL3: J25.10 U2.SCL
SCL4: J45.4 J50.4 J51.4 J52.4 Q6.2 R11.2
SCL5: J47.10 U3.SCL
SCL6: J67.4 J72.4 J73.4 J74.4 Q8.2 R15.2
SCL7: J69.10 U4.SCL
SDA: J1.3 J8.3 J9.3 J10.3 Q1.2 R3.2
SDA1: J3.9 U1.SDA
SDA2: J23.3 J28.3 J29.3 J30.3 Q3.2 R1.2
SDA3: J25.9 U2.SDA
SDA4: J45.3 J50.3 J51.3 J52.3 Q5.2 R9.2
SDA5: J47.9 U3.SDA
SDA6: J67.3 J72.3 J73.3 J74.3 Q7.2 R13.2
SDA7: J69.9 U4.SDA
TX: J2.2 U1.TX
TX1: J24.2 U2.TX
TX2: J46.2 U3.TX
TX3: J68.2 U4.TX
VIN [vcc]: J6.7 U1.VIN
VIN1 [vcc]: J27.7 U2.VIN
VIN2 [vcc]: J49.7 U3.VIN
VIN3 [vcc]: J71.7 U4.VIN